# EAGLE board CheetahBooster (EAGLE 7.6.0)
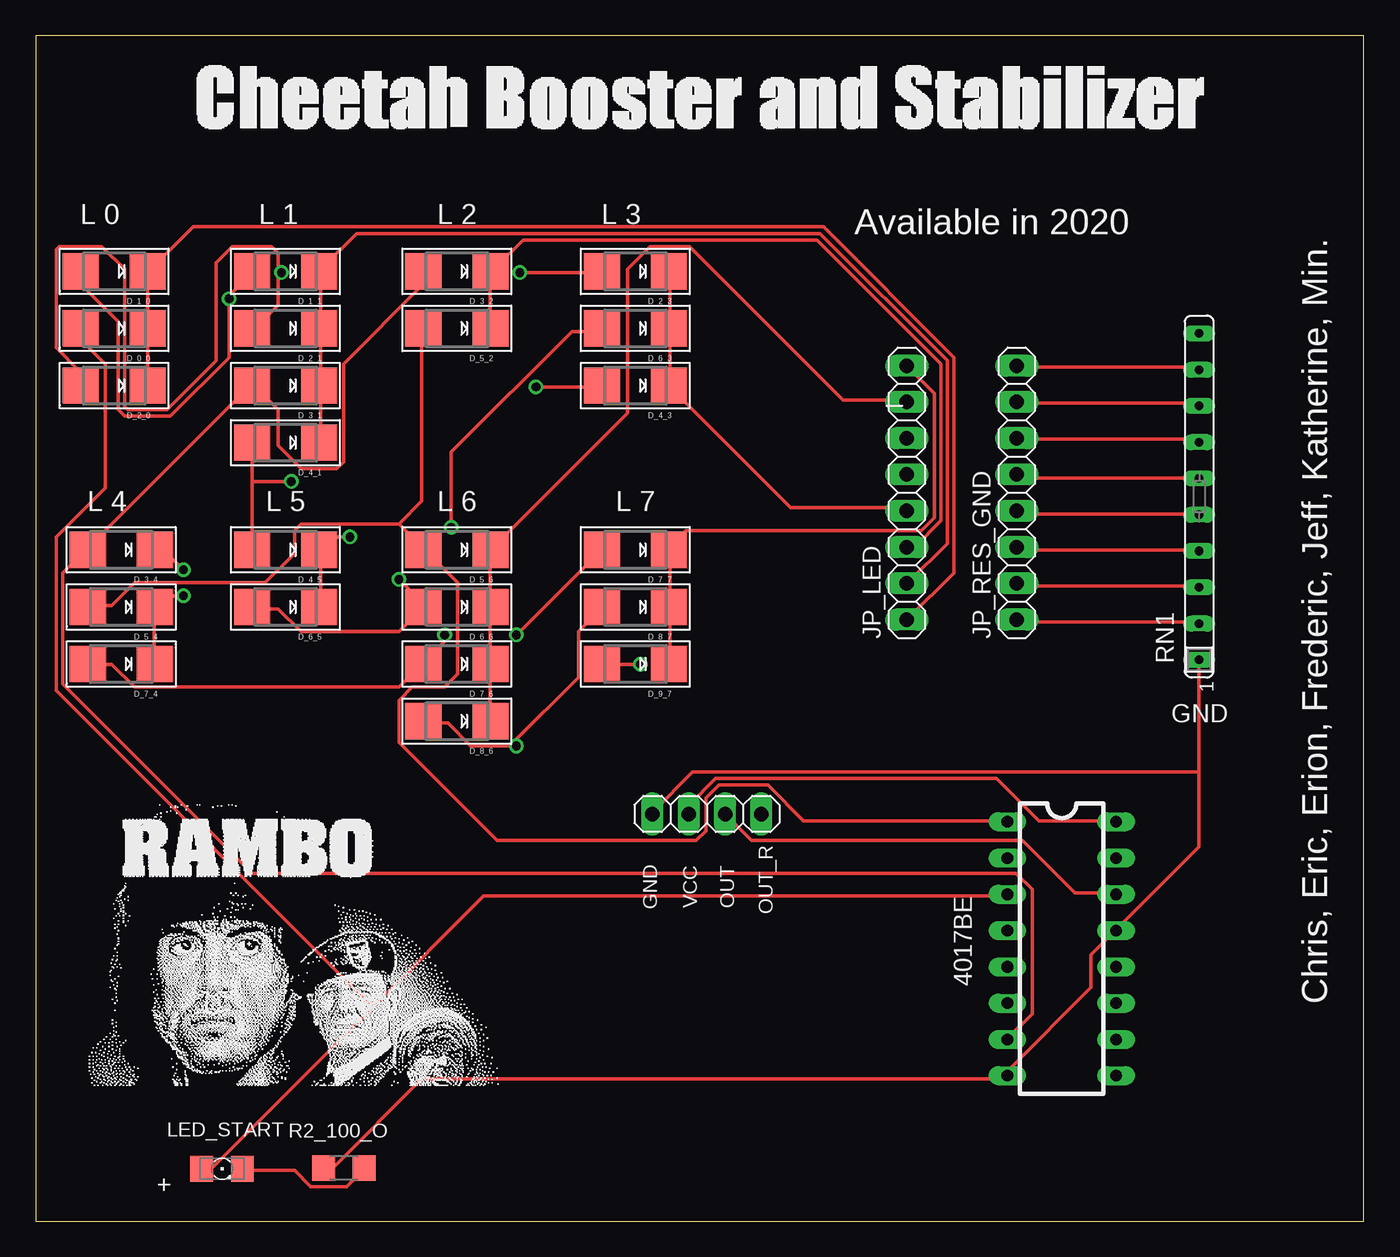
[diagram p0: board, top side]
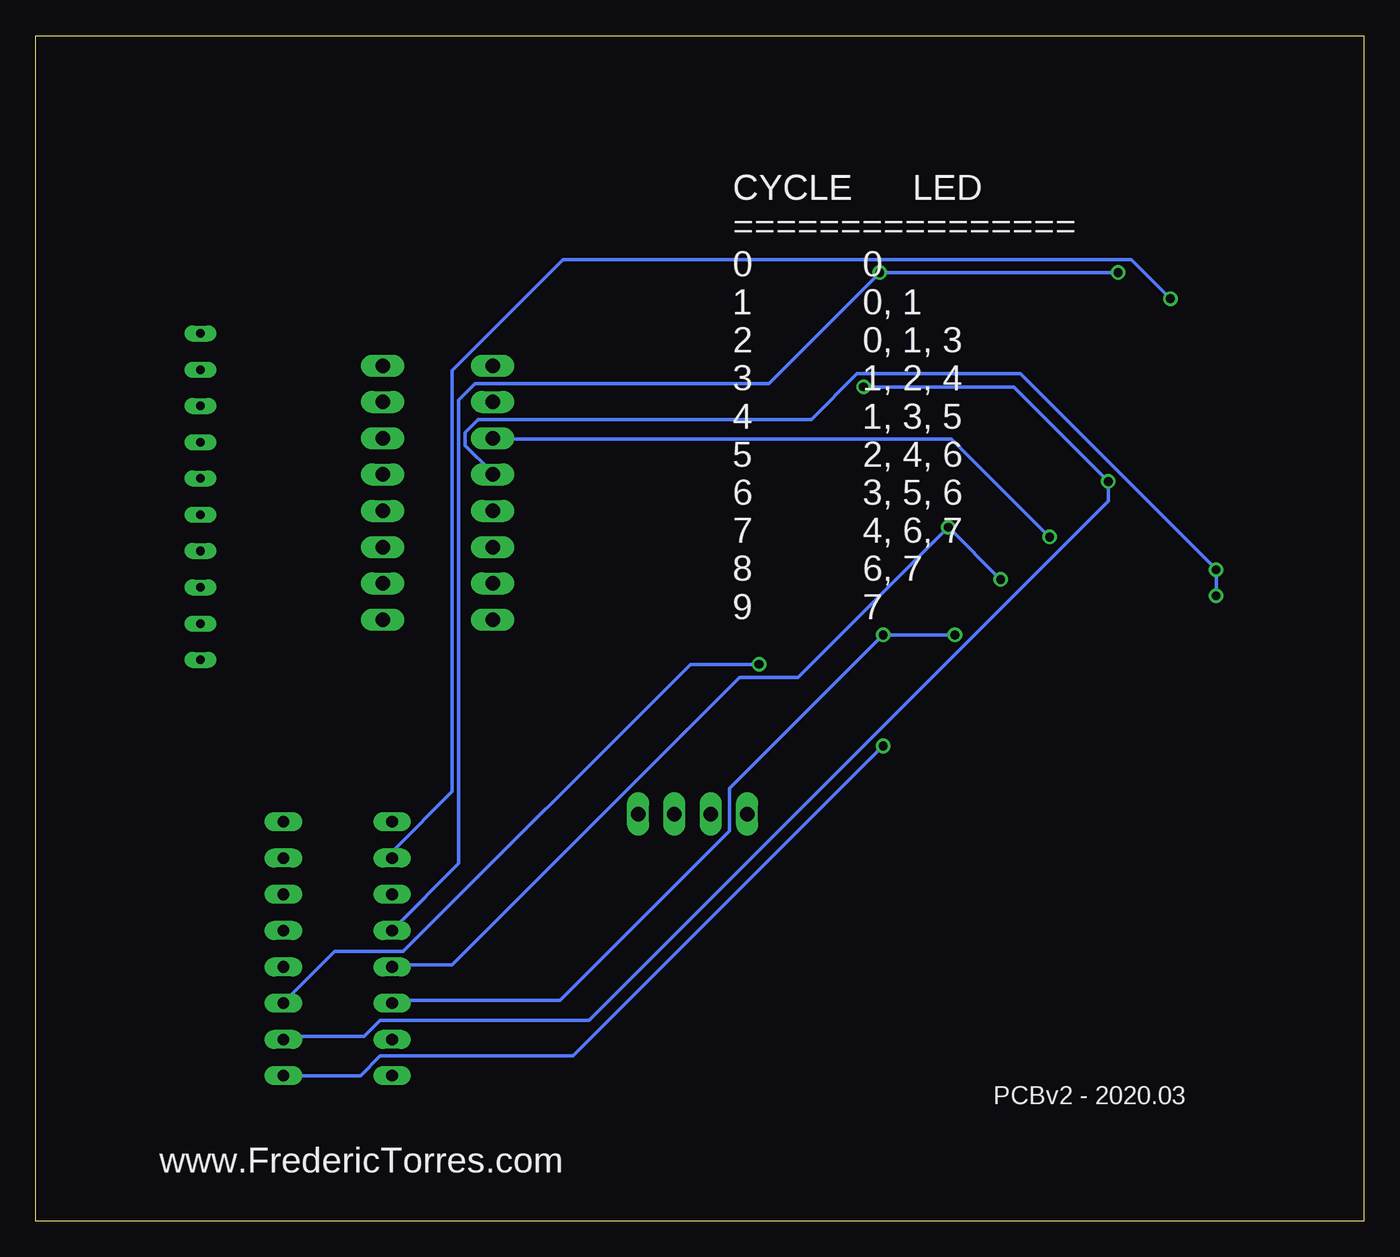
[diagram p1: board, bottom side, seen from below]

Size 93 x 83.01 mm. Coordinates in mm from the lower left corner, seen from the top.
Outline: 0,0 93,0 93,83.01 0,83.01 0,0
Copper layers (1*16): Top 0.035mm / dielectric 1.5mm / Bottom 0.035mm
Design rules "default": minimum track width 10mil, minimum drill 24mil, track to track 8mil, track to pad 8mil, pad to pad 8mil, via to via 8mil, smd to smd 8mil, copper to edge 40mil, drill to drill 8mil, minimum pad ring 10mil, minimum via ring 8mil, stop-mask expansion 4mil, vias tented up to drill 0mil, thermal gap 10mil

## Footprints (pad centres in the part's own frame; a part is rotated, then mirrored left to right if it is on the bottom)
DIL16 = drill 0.813 long: 1 -8.89,-3.81; 2 -6.35,-3.81; 3 -3.81,-3.81; 4 -1.27,-3.81; 5 1.27,-3.81; 6 3.81,-3.81; 7 6.35,-3.81; 8 8.89,-3.81; 9 8.89,3.81; 10 6.35,3.81; 11 3.81,3.81; 12 1.27,3.81; 13 -1.27,3.81; 14 -3.81,3.81; 15 -6.35,3.81; 16 -8.89,3.81
SMADIODE = smd 2.54 x 2.54: A 2.349,0; C -2.349,0
1X04 = drill 1.016 long: 1 -3.81,0; 2 -1.27,0; 3 1.27,0; 4 3.81,0
1X08 = drill 1.016 long: 1 -8.89,0; 2 -6.35,0; 3 -3.81,0; 4 -1.27,0; 5 1.27,0; 6 3.81,0; 7 6.35,0; 8 8.89,0
1206 = smd 1.6 x 1.803: A -1.422,0; C 1.422,0
R1206 = smd 1.6 x 1.803: 1 -1.422,0; 2 1.422,0
SIP10 = drill 0.6 long: 1 -11.46,0; 2 -8.92,0; 3 -6.38,0; 4 -3.84,0; 5 -1.3,0; 6 1.24,0; 7 3.78,0; 8 6.32,0; 9 8.86,0; 10 11.4,0

## Placement (x,y rotation side)
4017BE  CD4017  [DIL16]  71.85,19.07 270 top
D_0_0  [SMADIODE]  5.5,62.51 180 top
D_1_0  [SMADIODE]  5.5,66.51 180 top
D_1_1  [SMADIODE]  17.5,66.51 180 top
D_2_0  [SMADIODE]  5.5,58.51 180 top
D_2_1  [SMADIODE]  17.5,62.51 180 top
D_2_3  [SMADIODE]  42,66.51 180 top
D_3_1  [SMADIODE]  17.5,58.51 180 top
D_3_2  [SMADIODE]  29.5,66.51 180 top
D_3_4  [SMADIODE]  6,47.01 180 top
D_4_1  [SMADIODE]  17.5,54.51 180 top
D_4_3  [SMADIODE]  42,58.51 180 top
D_4_5  [SMADIODE]  17.5,47.01 180 top
D_5_2  [SMADIODE]  29.5,62.51 180 top
D_5_4  [SMADIODE]  6,43.01 180 top
D_5_6  [SMADIODE]  29.5,47.01 180 top
D_6_3  [SMADIODE]  42,62.51 180 top
D_6_5  [SMADIODE]  17.5,43.01 180 top
D_6_6  [SMADIODE]  29.5,43.01 180 top
D_7_4  [SMADIODE]  6,39.01 180 top
D_7_6  [SMADIODE]  29.5,39.01 180 top
D_7_7  [SMADIODE]  42,47.01 180 top
D_8_6  [SMADIODE]  29.5,35.01 180 top
D_8_7  [SMADIODE]  42,43.01 180 top
D_9_7  [SMADIODE]  42,39.01 180 top
JP_CLOCK_IN  [1X04]  47,28.51 0 top
JP_LED  [1X08]  61,51.01 90 top
JP_RES_GND  [1X08]  68.7,51.01 90 top
LED_START  [1206]  13.05,3.66 0 top
R2_100_O  [R1206]  21.58,3.71 0 top
RN1  [SIP10]  81.48,50.77 90 top

## Library data of the parts
4017BE = SparkFun-DigitalIC; PROD_ID: IC-11929
D_0_0 D_1_0 D_1_1 D_2_0 D_2_1 D_2_3 D_3_1 D_3_2 D_3_4 D_4_1 D_4_3 D_4_5 D_5_2 D_5_4 D_5_6 D_6_3 D_6_5 D_6_6 D_7_4 D_7_6 D_7_7 D_8_6 D_8_7 D_9_7 LED_START R2_100_O = adafruit
JP_CLOCK_IN JP_LED JP_RES_GND = pinhead
RN1 = resistor-sip

## Nets
DO_NOT_USE: RN1.10
GND: 4017BE.8 4017BE.13 JP_CLOCK_IN.1 R2_100_O.1 RN1.1
LED_0: D_0_0.C D_1_0.C D_2_0.C JP_LED.1
LED_1: D_1_1.C D_2_1.C D_3_1.C D_4_1.C JP_LED.2
LED_2: D_3_2.C D_5_2.C JP_LED.3
LED_3: D_2_3.C D_4_3.C D_6_3.C JP_LED.4
LED_4: D_3_4.C D_5_4.C D_7_4.C JP_LED.5
LED_5: D_4_5.C D_6_5.C JP_LED.6
LED_6: D_5_6.C D_6_6.C D_7_6.C D_8_6.C JP_LED.7
LED_7: D_7_7.C D_8_7.C D_9_7.C JP_LED.8
N$1: LED_START.C R2_100_O.2
R0: JP_RES_GND.1 RN1.2
R1: JP_RES_GND.2 RN1.3
R2: JP_RES_GND.3 RN1.4
R3: JP_RES_GND.4 RN1.5
R4: JP_RES_GND.5 RN1.6
R5: JP_RES_GND.6 RN1.7
R6: JP_RES_GND.7 RN1.8
R7: JP_RES_GND.8 RN1.9
RESET: 4017BE.15
SEG_0: 4017BE.3 D_0_0.A LED_START.A
SEG_1: 4017BE.2 D_1_0.A D_1_1.A
SEG_2: 4017BE.4 D_2_0.A D_2_1.A D_2_3.A
SEG_3: 4017BE.7 D_3_1.A D_3_2.A D_3_4.A
SEG_4: 4017BE.10 D_4_1.A D_4_3.A D_4_5.A
SEG_5: 4017BE.1 D_5_2.A D_5_4.A D_5_6.A
SEG_6: 4017BE.5 D_6_3.A D_6_5.A D_6_6.A
SEG_7: 4017BE.6 D_7_4.A D_7_6.A D_7_7.A
SEG_8: 4017BE.9 D_8_6.A D_8_7.A
SEG_9: 4017BE.11 D_9_7.A
TMR555_OUTPUT: 4017BE.14 JP_CLOCK_IN.3
TMR555_OUTPUT_REVERSE: JP_CLOCK_IN.4
VCC: 4017BE.16 JP_CLOCK_IN.2

## Tracks (layer width: path | path; a pad name or v marks a point on that pad's centre or on a via)
GND
  Top 0.254: R2_100_O.1 20.17,3.78 20.86,3.78 27.03,9.96 67.95,9.96 4017BE.8 68.18,10.19 68.18,10.64 73.89,16.36 73.89,18.64 75.5,20.24 4017BE.13 75.72,20.47 81.44,26.19 81.44,31.45 | 81.44,31.45 81.44,39.22 RN1.1 | 81.44,31.45 46.01,31.45 43.26,28.7 JP_CLOCK_IN.1
LED_0
  Top 0.254: D_2_0.C 7.83,58.65 7.83,62.31 D_0_0.C 7.83,62.54 7.83,66.42 D_1_0.C 8.06,66.65 11.03,69.62 55.15,69.62 64.29,60.48 64.29,45.39 61.09,42.19 JP_LED.1
LED_1
  Top 0.254: D_4_1.C 19.95,54.53 19.95,58.42 D_3_1.C 19.95,58.65 19.95,62.31 D_2_1.C 19.95,62.54 19.95,66.42 D_1_1.C 19.95,66.65 22.46,69.16 54.92,69.16 63.84,60.25 63.84,47.45 61.09,44.7 JP_LED.2
LED_2
  Top 0.254: D_5_2.C 31.83,62.54 31.83,66.42 D_3_2.C 32.06,66.65 34.12,68.71 54.69,68.71 63.38,60.02 63.38,49.05 61.55,47.22 61.09,47.22 JP_LED.3
LED_3
  Top 0.254: D_2_3.C 44.41,66.42 44.41,62.54 D_6_3.C 44.41,62.31 44.41,58.65 D_4_3.C 44.41,58.42 52.86,49.96 60.87,49.96 JP_LED.4
LED_4  (via drill 0.61)
  Top 0.254: D_7_4.C 8.29,39.22 8.29,42.88 D_5_4.C 8.52,43.1 9.2,43.79 v10.34,43.79 | v10.34,45.62 8.97,46.99 8.52,46.99 D_3_4.C
  Bottom 0.254: v10.34,43.79 v10.34,45.62 24.06,59.33 35.49,59.33 38.69,56.13 62.01,56.13 62.92,55.22 62.92,54.31 61.09,52.48 JP_LED.5
LED_5  (via drill 0.61)
  Top 0.254: D_6_5.C 19.95,43.1 19.95,46.99 D_4_5.C 19.95,47.22 20.63,47.9 v22,47.9
  Bottom 0.254: v22,47.9 28.86,54.76 60.87,54.76 JP_LED.6
LED_6
  Top 0.254: D_8_6.C 31.83,35.1 31.83,38.99 D_7_6.C 31.83,39.22 31.83,42.88 D_6_6.C 31.83,43.1 31.83,46.99 D_5_6.C 32.06,47.22 41.43,56.59 41.43,66.65 43.03,68.25 45.78,68.25 56.52,57.51 60.87,57.51 JP_LED.7
LED_7
  Top 0.254: D_9_7.C 44.41,39.22 44.41,42.88 D_8_7.C 44.41,43.1 44.41,46.99 D_7_7.C 44.41,47.22 45.55,48.36 62.01,48.36 62.92,49.28 62.92,57.96 61.09,59.79 JP_LED.8
N$1
  Top 0.254: LED_START.C 14.69,3.56 18.12,3.56 19.26,2.41 21.77,2.41 22.92,3.56 R2_100_O.2
R0
  Top 0.254: RN1.2 81.44,41.96 68.87,41.96 JP_RES_GND.1
R1
  Top 0.254: RN1.3 81.44,44.48 68.87,44.48 JP_RES_GND.2
R2
  Top 0.254: RN1.4 81.44,46.99 68.87,46.99 JP_RES_GND.3
R3
  Top 0.254: RN1.5 81.44,49.5 69.09,49.5 68.87,49.73 JP_RES_GND.4
R4
  Top 0.254: RN1.6 81.44,52.02 69.09,52.02 68.87,52.25 JP_RES_GND.5
R5
  Top 0.254: RN1.7 81.44,54.76 68.87,54.76 JP_RES_GND.6
R6
  Top 0.254: RN1.8 81.44,57.28 68.87,57.28 JP_RES_GND.7
R7
  Top 0.254: RN1.9 81.44,59.79 68.87,59.79 JP_RES_GND.8
SEG_0
  Top 0.254: 23.6,14.99 31.38,22.76 67.95,22.76 4017BE.3 | 23.6,14.99 12.4,3.78 11.72,3.78 LED_START.A | 23.6,14.99 1.43,37.16 1.43,47.9 4.86,51.33 4.86,60.02 3.26,61.62 3.26,62.31 D_0_0.A
SEG_1  (via drill 0.61)
  Top 0.254: D_1_0.A 3.26,66.42 3.26,65.51 5.77,62.99 5.77,56.82 6.23,56.36 9.43,56.36 13.54,60.48 v13.54,64.59 13.54,64.82 15.14,66.42 D_1_1.A
  Bottom 0.254: v13.54,64.59 16.29,67.34 56.06,67.34 63.84,59.56 63.84,30.07 67.95,25.96 67.95,25.5 4017BE.2
SEG_2  (via drill 0.61)
  Top 0.254: 16.97,66.42 16.97,64.14 15.37,62.54 D_2_1.A | 16.97,66.42 16.97,67.79 16.52,68.25 13.77,68.25 12.63,67.11 12.63,60.25 9.2,56.82 6.46,56.82 6.23,57.05 6.23,66.65 4.63,68.25 1.66,68.25 1.43,68.02 1.43,61.16 3.03,59.56 3.03,58.65 D_2_0.A | v33.89,66.42 39.6,66.42 D_2_3.A | 16.97,66.42 v17.2,66.42
  Bottom 0.254: v17.2,66.42 v33.89,66.42 41.66,58.65 62.24,58.65 63.38,57.51 63.38,25.04 67.95,20.47 4017BE.4
SEG_3
  Top 0.254: D_3_2.A 27.03,66.42 27.03,65.51 21.55,60.02 21.55,53.16 21.09,52.71 18.57,52.71 16.97,54.31 16.97,56.82 15.37,58.42 D_3_1.A 15.14,58.65 3.71,47.22 D_3_4.A 3.49,46.99 1.89,45.39 1.89,37.62 15.14,24.36 68.64,24.36 69.78,23.22 69.78,14.53 68.18,12.93 4017BE.7
SEG_4  (via drill 0.61)
  Top 0.254: 15.14,51.79 15.14,54.31 D_4_1.A | 15.14,51.79 15.14,47.22 D_4_5.A | v35.03,58.42 39.6,58.42 D_4_3.A | 15.14,51.79 v17.89,51.79
  Bottom 0.254: v35.03,58.42 24.52,58.42 v17.89,51.79 17.89,50.42 54.24,14.07 68.87,14.07 70.01,12.93 75.5,12.93 4017BE.10
SEG_5
  Top 0.254: 25.43,48.82 18.57,48.82 18.12,48.36 18.12,46.76 16.06,44.7 6.91,44.7 5.32,43.1 3.71,43.1 D_5_4.A | 25.43,48.82 27.03,47.22 D_5_6.A 27.26,46.99 29.55,44.7 29.55,38.3 28.63,37.39 26.35,37.39 25.43,36.47 25.43,33.5 32.29,26.64 46.23,26.64 46.92,27.33 46.92,29.62 47.84,30.53 51.26,30.53 53.78,28.02 67.95,28.02 4017BE.1 | 25.43,48.82 27.03,50.42 27.03,62.31 D_5_2.A
SEG_6  (via drill 0.61)
  Top 0.254: D_6_5.A 15.37,42.88 16.97,42.88 18.57,41.28 25.43,41.28 27.03,42.88 D_6_6.A 27.26,43.1 v25.43,44.93 | v29.09,48.59 29.09,53.85 37.55,62.31 39.6,62.31 D_6_3.A
  Bottom 0.254: v25.43,44.93 v29.09,48.59 39.6,38.07 43.72,38.07 63.84,17.96 67.95,17.96 4017BE.5
SEG_7  (via drill 0.61)
  Top 0.254: D_7_4.A 3.71,38.99 5.32,38.99 6.91,37.39 25.43,37.39 27.03,38.99 D_7_6.A 27.26,39.22 28.63,40.59 v28.63,41.05 | v33.66,41.05 39.6,46.99 D_7_7.A
  Bottom 0.254: v28.63,41.05 v33.66,41.05 44.41,30.3 44.41,27.33 56.29,15.44 67.95,15.44 4017BE.6
SEG_8  (via drill 0.61)
  Top 0.254: 33.43,33.5 38.01,38.07 38.01,41.28 39.6,42.88 D_8_7.A | 33.43,33.5 33.2,33.27 30.46,33.27 28.86,34.87 27.26,34.87 D_8_6.A | 33.43,33.5 v33.66,33.27
  Bottom 0.254: v33.66,33.27 55.38,11.56 68.87,11.56 70.24,10.19 75.5,10.19 4017BE.9
SEG_9  (via drill 0.61)
  Top 0.254: v42.35,38.99 39.83,38.99 D_9_7.A
  Bottom 0.254: v42.35,38.99 47.15,38.99 67.27,18.87 72.07,18.87 75.5,15.44 4017BE.11
TMR555_OUTPUT
  Top 0.254: 4017BE.14 75.5,22.99 72.75,22.99 69.09,26.64 50.12,26.64 48.29,28.47 JP_CLOCK_IN.3
VCC
  Top 0.254: 4017BE.16 75.5,28.02 70.24,28.02 67.27,30.99 47.61,30.99 45.78,29.16 45.78,28.7 JP_CLOCK_IN.2

## Text on the board
tNames: L 0 | L 1 | L 2 | L 3 | Available in 2020 | L 4 | L 5 | L 6 | L 7 | Chris, Eric, Erion, Frederic, Jeff, Katherine, Min. | GND | OUT_R | GND | VCC | OUT | +
bNames: CYCLE LED / ================ / 0 0 / 1 0, 1 / 2 0, 1, 3 / 3 1, 2, 4 / 4 1, 3, 5 / 5 2, 4, 6 / 6 3, 5, 6 / 7 4, 6, 7 / 8 6, 7 / 9 7 | PCBv2 - 2020.03 | www.FredericTorres.com